# EAGLE board uPlaits_SE_Assembly_Template (EAGLE 9.6.2)
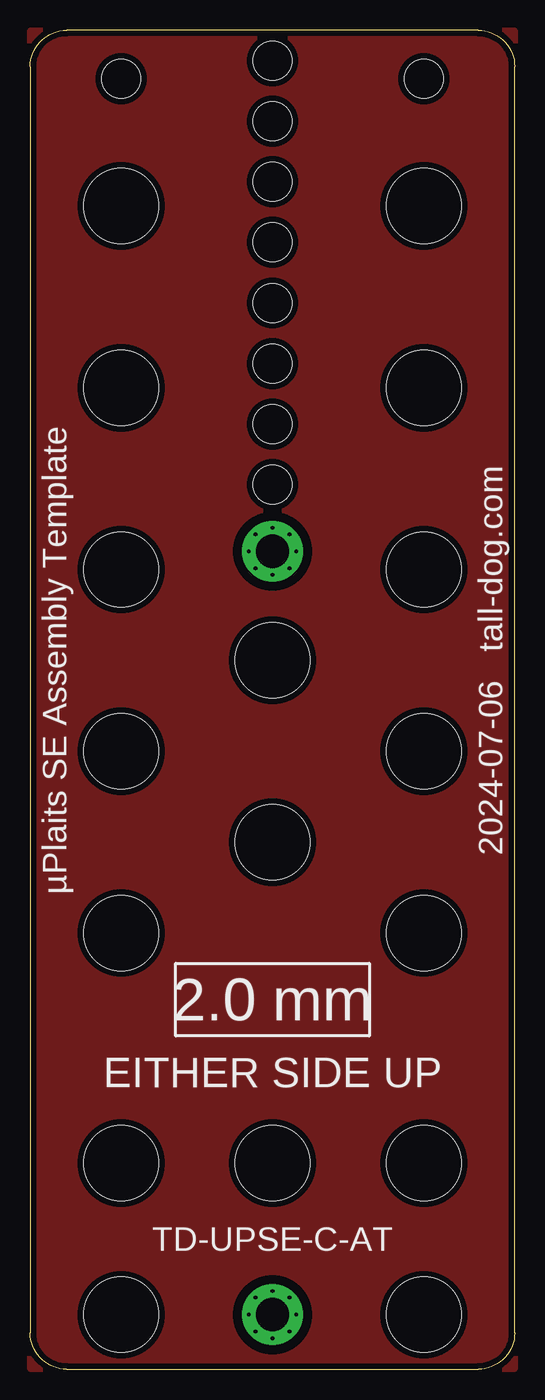
[diagram p0: board, top side]
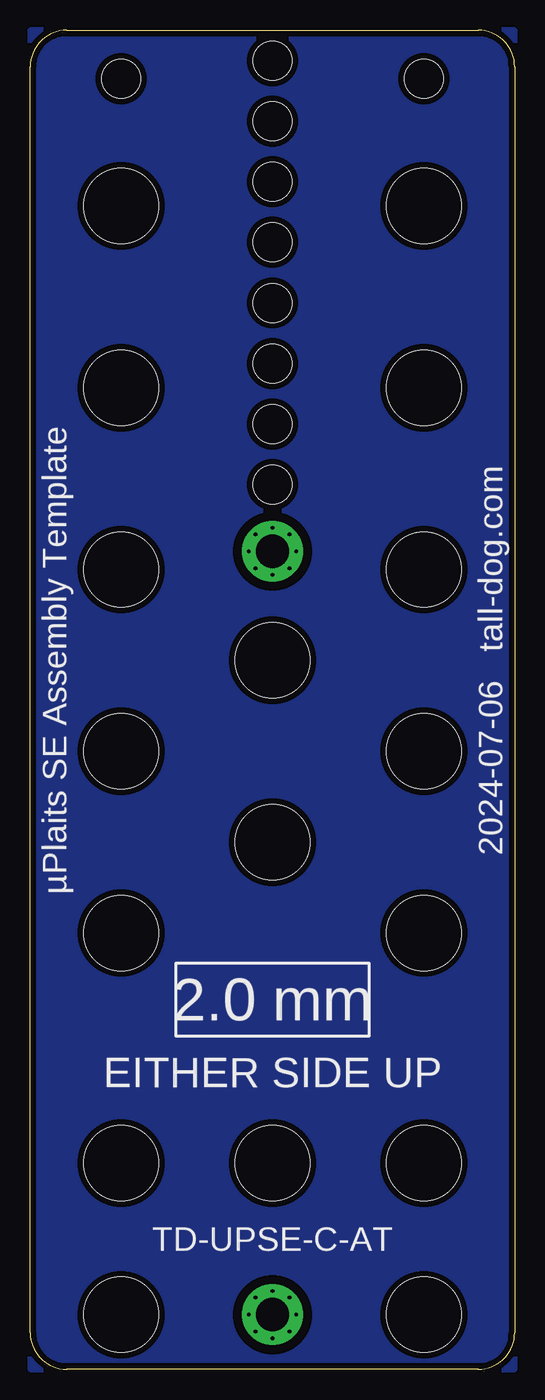
[diagram p1: board, bottom side, seen from below]

Size 40 x 110.5 mm. Coordinates in mm from the lower left corner, seen from the top.
Outline: 3,0 37,0 arc90 40,3 40,107.5 arc90 37,110.5 3,110.5 arc90 0,107.5 0,3 arc90 3,0
Copper layers (1*16): Top 0.035mm / dielectric 1.5mm / Bottom 0.035mm
Design rules "default *": minimum track width 6mil, minimum drill 0.3mm, track to track 6mil, track to pad 6mil, pad to pad 6mil, via to via 6mil, smd to smd 6mil, copper to edge 10mil, drill to drill 6mil, minimum pad ring 10mil, minimum via ring 8mil, stop-mask expansion 4mil, vias tented up to drill 0mil, thermal gap 10mil
Holes 6.2 mm at 7.5,96 7.5,81 7.5,66 7.5,51 7.5,36 32.5,96 32.5,81 32.5,66 32.5,51 20,58.5 20,43.5 32.5,36 7.5,17 20,17 32.5,17 32.5,4.5 7.5,4.5
Holes 3.2 mm at 7.5,106.5 32.5,106.5 20,108 20,103 20,98 20,93 20,88 20,83 20,78 20,73

## Footprints (pad centres in the part's own frame; a part is rotated, then mirrored left to right if it is on the bottom)
HOLE-M2.5 = drill 2.75 pad 5: P$1 0,0 | drill 0.3: P$2 0,1.95; P$3 0,-1.95; P$4 -1.95,0; P$5 1.95,0; P$6 1.4,1.4; P$7 -1.4,1.4; P$8 -1.4,-1.4; P$9 1.4,-1.4

## Placement (x,y rotation side)
E$1  [HOLE-M2.5]  20,67.5 0 top
E$2  [HOLE-M2.5]  20,4.5 0 top

## Library data of the parts
E$1 E$2 = uPlaits_SE_Library

## Tracks (layer width: path | path; a pad name or v marks a point on that pad's centre or on a via)
GND
  pour Top (isolate 0.5): 0,110.5 40,110.5 40,0 0,0
  pour Bottom (isolate 0.5): 0,110.5 40,110.5 40,0 0,0

## Text on the board
tPlace: µPlaits SE Assembly Template | 2024-07-06 tall-dog.com | 2.0 mm | EITHER SIDE UP | TD-UPSE-C-AT
bPlace: 2024-07-06 tall-dog.com | µPlaits SE Assembly Template | 2.0 mm | EITHER SIDE UP | TD-UPSE-C-AT